# Allegro board Hirose70239_Jan21.brd
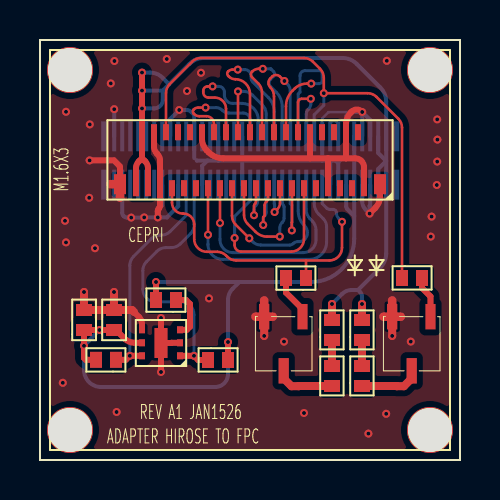
[diagram p0: board, top side]
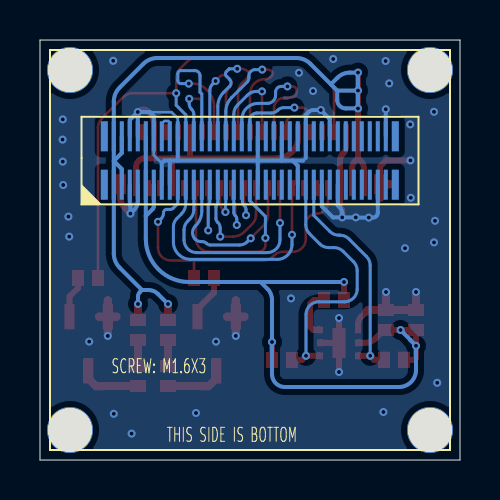
[diagram p1: board, bottom side, seen from below]

Outline 21 x 21 mm; copper layers: TOP, BOTTOM. Coordinates in mm from the lower left corner of the outline.
Outline path: 0,21 0,0 21,0 21,21 0,21

## Design rules (mm)
constraint set DEFAULT: min track width 0.127
net group IR_UART_RX: nets IR_UART_RX N3267747
net group IR_UART_TX: nets IR_UART_TX N3267743

## Placement (name value [footprint] x y rotation side)
C1  0.1uF  [C0402_SMT]  2.2 6.5 90 top
C2  0.1uF  [C0402_SMT]  3.7 6.5 90 top
D1  LED  [LED0402_SMT]  14.6 6 90 top
D2  LED  [LED0402_SMT]  16.1 6 90 top
J1  Hirose FH35C-39S-0.3SHW  [FH35C-39S-0D3SHW]  10.5 13.59 0 top
J2  DF40HC(3.0)-70DS-0.4V(51)  [DF40HC-70DS_]  17.31 16.18 180 bottom
NOREF  -  [unnamed]  1.5 1.5 0 top
NOREF#2  -  [#2]  1.5 1.5 0 top
NOREF#3  -  [unnamed]  19.5 19.5 0 top
NOREF#4  -  [#2]  0 0 90 top
NOREF#5  -  [unnamed]  1.5 19.5 0 top
NOREF#6  -  [unnamed]  19.5 1.5 0 top
NOREF#7  -  [#2]  0 21 0 top
NOREF#8  -  [unnamed#2]  3.23 16.18 180 bottom
NOREF#9  -  [unnamed#2]  3.23 13.77 180 bottom
NOREF#10  -  [unnamed#2]  17.79 13.77 180 bottom
NOREF#11  -  [unnamed#2]  17.79 16.18 180 bottom
Q1  MMBT2222ALT1G  [SOT-23-3]  13.6 7.6 180 top
Q2  MMBT2222ALT1G  [SOT-23-3]  20 7.6 180 top
R1  1K  [R0402_SMT]  18.1 9.1 0 top
R2  1K  [R0402_SMT]  13.3 9.1 180 top
R3  10K  [R0402_SMT]  6.8 8 180 top
R4  10K  [R0402_SMT]  3.8 5.01 180 top
R5  10K  [R0402_SMT]  8.4 5 0 top
R6  20K  [R0402_SMT]  14.6 3.7 90 top
R7  20K  [R0402_SMT]  16.1 3.7 90 top
U1  TMP117  [WDFN-6-EP-2X2]  7.1 6.9 180 top

## Library data of the parts
C1 C2 = CAP NP
D1 D2 = LED
J1 = HiroseFPC_0
J2 = Header2x35
Q1 Q2 = MMBT2222AL
R1 R2 = R: signal model: DEFAULT_RESISTOR_10000OHM_2_1
R3-R7 = R
U1 = TMP117

## Footprints (pads in the part's own frame, mm; a bottom-side part is the same pattern mirrored in y, then rotated)
C0402_SMT
  rect 0.6x0.8 smd: 1(0,0) 2(1,0)
DF40HC-70DS_
  rect 0.2x1.5 smd: 1(0,-2.42) 2(0,0) 3(0.4,-2.42) 4(0.4,0) 5(0.8,-2.42) 6(0.8,0) 7(1.2,-2.42) 8(1.2,0) 9(1.6,-2.42) 10(1.6,0) 11(2,-2.42) 12(2,0) 13(2.4,-2.42) 14(2.4,0) 15(2.8,-2.42) 16(2.8,0) 17(3.2,-2.42) 18(3.2,0) 19(3.6,-2.42) 20(3.6,0) 21(4,-2.42) 22(4,0) 23(4.4,-2.42) 24(4.4,0) 25(4.8,-2.42) 26(4.8,0) 27(5.2,-2.42) 28(5.2,0) 29(5.6,-2.42) 30(5.6,0) 31(6,-2.42) 32(6,0) 33(6.4,-2.42) 34(6.4,0) 35(6.8,-2.42) 36(6.8,0) 37(7.2,-2.42) 38(7.2,0) 39(7.6,-2.42) 40(7.6,0) 41(8,-2.42) 42(8,0) 43(8.4,-2.42) 44(8.4,0) 45(8.8,-2.42) 46(8.8,0) 47(9.2,-2.42) 48(9.2,0) 49(9.6,-2.42) 50(9.6,0) 51(10,-2.42) 52(10,0) 53(10.4,-2.42) 54(10.4,0) 55(10.8,-2.42) 56(10.8,0) 57(11.2,-2.42) 58(11.2,0) 59(11.6,-2.42) 60(11.6,0) 61(12,-2.42) 62(12,0) 63(12.4,-2.42) 64(12.4,0) 65(12.8,-2.42) 66(12.8,0) 67(13.2,-2.42) 68(13.2,0) 69(13.6,-2.42) 70(13.6,0)
FH35C-39S-0D3SHW
  rect 0.3x0.8 smd: 1(-5.7,0) 2(-5.4,2.8) 3(-5.1,0) 4(-4.8,2.8) 5(-4.5,0) 6(-4.2,2.8) 7(-3.9,0) 8(-3.6,2.8) 9(-3.3,0) 10(-3,2.8) 11(-2.7,0) 12(-2.4,2.8) 13(-2.1,0) 14(-1.8,2.8) 15(-1.5,0) 16(-1.2,2.8) 17(-0.9,0) 18(-0.6,2.8) 19(-0.3,0) 20(0,2.8) 21(0.3,0) 22(0.6,2.8) 23(0.9,0) 24(1.2,2.8) 25(1.5,0) 26(1.8,2.8) 27(2.1,0) 28(2.4,2.8) 29(2.7,0) 30(3,2.8) 31(3.3,0) 32(3.6,2.8) 33(3.9,0) 34(4.2,2.8) 35(4.5,0) 36(4.8,2.8) 37(5.1,0) 38(5.4,2.8) 39(5.7,0)
  rect 0.6x1 smd: 40(6.5,0.2) 41(-6.5,0.2)
LED0402_SMT
  rect 0.6x0.8 smd: 1(0,0) 2(1,0)
R0402_SMT
  rect 0.6x0.8 smd: 1(0,0) 2(1,0)
SOT-23-3
  rect 0.51x1.27 smd: 1(0.476,0.434) 2(2.391,0.434) 3(1.415,3.142)
unnamed
  round 2.3 hole 2.2 unplated: (0,0)
unnamed#2
  rect 0.35x1.5 smd: (0,0)
WDFN-6-EP-2X2
  rect 0.3x0.35 smd: 1(0.1,1.69) 2(0.1,1.04) 3(0.1,0.39) 4(2,0.39) 5(2,1.04) 6(2,1.69)
  rect 0.65x1.5 smd: 7(1.05,1.05)

## Nets
GND: C1.2 C2.2 J1.4 J1.5 J1.12 J1.30 J1.33 J1.36 J1.39 J1.40 J1.41 J2.5 J2.6 J2.7 J2.8 J2.12 J2.13 J2.15 J2.18 J2.37 J2.38 J2.44 J2.47 J2.50 J2.53 J2.56 J2.57 J2.67 J2.70 Q1.2(EMITTER) Q2.2(EMITTER) U1.2 U1.4 U1.7
ALERT: R3.1 U1.3
IR_1V8: C1.1 C2.1 J2.9 J2.10 J2.11 R3.2 R4.2 R5.2 U1.5(V+)
IR_3V3: J2.14 J2.16
IR_5V0: D1.2 D2.2 J1.1 J1.2 J1.3(VDD50#3) J2.1 J2.2 J2.3 J2.4
IR_D0: J1.13 J2.19
IR_D1: J1.14 J2.36
IR_D2: J1.15 J2.21
IR_D3: J1.16 J2.34
IR_D4: J1.17 J2.23
IR_D5: J1.18 J2.32
IR_D6: J1.19 J2.27
IR_D7: J1.20 J2.30
IR_D8: J1.21 J2.33
IR_D9: J1.22 J2.28
IR_D10: J1.23 J2.31
IR_D11: J1.24 J2.26
IR_D12: J1.25 J2.29
IR_D13: J1.26 J2.24
IR_D14: J2.49 R5.1 U1.1
IR_D15: J2.51 R4.1 U1.6
IR_HSYNC: J1.28 J2.22
IR_PCLK: J1.29 J2.35
IR_UART_RX: J1.6 J2.20 R1.1
IR_UART_TX: J1.7 J2.17 R2.1
IR_VSYNC: J1.27 J2.25
N3267503: D2.1(CATHODE) R7.2
N3267563: D1.1(CATHODE) R6.2
N3267651: Q1.3 R6.1
N3267655: Q2.3 R7.1
N3267743: Q1.1 R2.2
N3267747: Q2.1 R1.2

Pads without a net: J1 8 9 10 11 31 32 34 35 37 38; J2 39 40 41 42 43 45 46 48 52 54 55 58 59 60 61 62 63 64 65 66 68 69

## Via types
v1: diameter 0.4, hole 0.2, TOP to BOTTOM, 70 vias

## Routing (per net, layer and track width the routed paths; a pad name or vN(x,y) marks a point on that pad's centre or on a via; arc(x,y) is an arc through that point)
GND: length 80.5
  TOP w0.3: 15.3,15.08 J1.36 15.3,16.78 arc(15.36,17.1) 15.55,17.38 15.59,17.42 arc(15.84,17.52) 16.09,17.42 v1(16.11,17.4) ; 15.3,15.08 14.4,15.08 ; 15.3,15.08 15.76,15.08 arc(16.07,14.96) 16.2,14.65 J1.39 ; 14.4,15.08 J1.33 ; 14.4,15.08 13.5,15.08 ; v1(16.48,12.32) 16.75,12.59 arc(16.94,12.87) 17,13.19 J1.40 ; J1.30 13.5,15.08 ; 13.5,15.08 9.16,15.08 arc(8.77,15.16) 8.44,15.38 8.32,15.5 arc(8.16,15.74) 8.1,16.04 J1.12 ; 4.7,7.4 4.95,7.15 arc(5.06,6.98) 5.1,6.79 U1.4 ; U1.7 v1(6.05,4.4) ; U1.7 6.57,5.85 6.58,5.86 U1.2 ; U1.7 v1(6.05,7.1) ; v1(2.48,14.98) 3.7,14.98 3.98,14.7 arc(4,14.66) 4,14.62 J1.41 ; J1.4 5.7,15.66 arc(5.74,15.48) 5.84,15.33 5.86,15.31 arc(5.96,15.16) 6,14.98 J1.5 6,12.7 arc(5.99,12.64) 5.95,12.58 5.94,12.57 arc(5.9,12.52) 5.89,12.46 v1(5.89,12.13)
  TOP w0.4: 4.7,7.4 4.6,7.5 C2.2 ; Q1.2 v1(11.21,6.2) ; v1(2.2,8.4) C1.2 C2.2 ; C2.2 v1(3.7,8.4) ; Q2.2 v1(17.61,6.2)
  TOP w0.427: Q1.2 11.64,7.17 ; Q1.2 11.21,7.98 ; Q1.2 10.78,7.17 ; Q2.2 17.61,7.98 ; Q2.2 18.04,7.17 ; Q2.2 17.18,7.17 ; 4,13.11 J1.41 3.52,13.79
  BOTTOM w0.127: J2.18 14.11,17.08 14.42,17.39 15.51,17.39 ; 7.84,14.97 7.71,15.1 ; J2.12 15.31,15.24 14.91,14.84
  BOTTOM w0.2: 14.11,14.97 J2.18 ; 14.11,14.97 14.51,14.97 14.51,14.97 ; 14.11,14.97 10.11,14.97 ; 8.91,14.97 8.91,14.97 10.11,14.97 ; 8.91,14.97 8.91,16.18 ; 8.91,14.97 8.37,14.97 ; J2.12 15.31,17.19 15.52,17.4 v1(16.11,17.4) ; 10.11,13.77 10.11,14.97 ; 10.11,14.97 10.11,16.18 ; 8.11,13.77 8.11,14.71 8.37,14.97 ; J2.7 16.11,12.93 arc(16.15,12.71) 16.28,12.52 v1(16.48,12.32) 16.48,12.71 16.51,12.74 J2.5 ; J2.13 14.91,14.84 14.78,14.97 14.51,14.97 ; v1(5.89,12.13) v1(5.21,12.13) 5.2,12.12 v1(4.56,12.12) 4.35,12.12 arc(4.27,12.14) 4.2,12.18 4.17,12.21 arc(4.13,12.28) 4.11,12.36 4.11,13.77 ; v1(5.89,12.13) 6.35,12.13 6.91,12.69 6.91,13.77 ; v1(5.89,12.13) 5.89,12.37 arc(5.91,12.5) 5.99,12.61 6.11,12.73 6.11,13.77 ; J2.15 14.51,14.97 ; 6.51,16.18 6.51,17.05 v1(6.96,17.5) 7.32,17.5 arc(7.46,17.47) 7.58,17.39 7.71,17.26 7.71,15.1 ; J2.8 v1(16.11,17.4) ; v1(16.11,17.4) 16.51,17 J2.6 ; 8.37,14.97 7.84,14.97 7.84,14.97 ; 3.71,16.18 v1(3.71,17.54)
  vias: v1(1.14,3.86) v1(1.25,11.96) v1(1.3,17.41) v1(1.3,10.88) v1(2.49,16.78) v1(2.46,13.11) v1(2.75,10.59) v1(3.54,18.83) v1(3.72,19.95) v1(3.83,2.4) v1(6.34,20.05) v1(7.35,18.45) v1(8.05,19.36) v1(8.45,8.08) v1(12.2,5.92) v1(13.2,2.35) v1(16.42,1.32) v1(17.34,19.96) v1(17.31,2.31) v1(18.54,5.92) v1(19.54,11.17) v1(19.58,12.17) v1(19.84,13.75) v1(19.86,17.03) v1(19.87,16.02) v1(19.86,14.92)
ALERT: length 2.5
  TOP w0.3: U1.3 7.34,6.51 7.5,6.67 7.5,7.8 7.3,8 R3.1
IR_1V8: length 40.1
  TOP w0.3: U1.5 4.74,5.86 arc(4.46,5.92) 4.23,6.07 3.8,6.5 C2.1 v1(2.97,6.5) C1.1 v1(2.2,5.71) 2.2,5.1 2.29,5.01 R4.2 ; R3.2 v1(5.8,8.9) ; R5.2 v1(9.4,5.9)
  BOTTOM w0.2: J2.10 J2.9 15.71,12.2 ; J2.11 15.31,12.68 arc(15.33,12.61) 15.37,12.54 15.71,12.2 ; 9.97,8.9 9.62,8.55 arc(9.46,8.31) 9.4,8.02 v1(9.4,5.9) 9.4,4.29 arc(9.21,3.84) 8.76,3.65 3.05,3.65 arc(2.45,3.9) 2.2,4.5 v1(2.2,5.71) 2.48,5.99 2.48,6 v1(2.97,6.5) ; 9.97,8.9 v1(5.8,8.9) ; 9.97,8.9 13.55,8.9 arc(15.08,9.53) 15.71,11.06 15.71,12.2
IR_3V3: length 1.8
  BOTTOM w0.127: J2.14 14.91,16.81 14.77,16.95 14.59,16.95 14.51,16.87 J2.16
IR_5V0: length 43.1
  TOP w0.3: 5.1,15.09 J1.2 v1(5.1,17.58) v1(5.1,18.47) v1(5.1,19.37) ; 5.1,15.09 5.26,14.93 arc(5.36,14.77) 5.4,14.59 J1.3 ; 5.1,15.09 4.94,14.93 arc(4.84,14.77) 4.8,14.59 J1.1
  TOP w0.4: D2.2 v1(16.1,7.8) ; D1.2 v1(14.6,7.8)
  BOTTOM w0.2: v1(5.1,18.47) v1(5.1,19.37) 5.5,19.37 arc(5.84,19.3) 6.13,19.11 6.46,18.79 ; v1(5.1,18.47) 6.14,18.47 ; v1(5.1,18.47) v1(5.1,17.58) 5.71,17.58 arc(6.02,17.7) 6.14,18 6.14,18.47 ; 6.14,18.47 6.46,18.79 ; 17.31,14.95 16.91,15.35 J2.4 ; 17.31,14.95 J2.1 17.31,10.32 arc(17.23,9.94) 17.02,9.62 15.9,8.5 ; 17.31,14.95 16.91,14.55 J2.3 ; 17.31,14.95 J2.2 17.31,17.92 arc(17.23,18.3) 17.02,18.62 15.83,19.81 arc(15.51,20.02) 15.13,20.1 8.18,20.1 arc(7.8,20.02) 7.48,19.81 6.46,18.79 ; v1(16.1,7.8) 16.1,8.18 arc(16.08,8.29) 16.01,8.39 15.9,8.5 ; v1(14.6,7.8) 15.1,8.3 arc(15.32,8.45) 15.58,8.5 15.9,8.5
IR_D0: length 12.7
  TOP w0.127: J1.13 v1(8.4,11.26)
  BOTTOM w0.15: v1(8.4,11.26) 8.4,10.77 arc(8.62,10.25) 9.14,10.03 13.46,10.03 arc(14.08,10.28) 14.33,10.9 14.33,11.66 arc(14.29,11.88) 14.16,12.07 13.93,12.3 arc(13.77,12.54) 13.71,12.83 J2.19
IR_D1: length 5.9
  TOP w0.127: J1.14 8.7,16.8 arc(8.59,17.08) 8.31,17.19 7.96,17.19 arc(7.82,17.22) 7.71,17.3 7.68,17.32 arc(7.64,17.42) 7.68,17.52 7.69,17.53 arc(7.79,17.6) 7.91,17.62 v1(8.28,17.62)
  BOTTOM w0.15: v1(8.28,17.62) 8.8,17.62 arc(8.97,17.59) 9.11,17.49 9.12,17.48 arc(9.26,17.38) 9.43,17.35 10.15,17.35 arc(10.41,17.25) 10.51,16.99 10.51,16.18
IR_D2: length 11
  TOP w0.127: J1.15 v1(9,11.85)
  BOTTOM w0.15: 13.31,13.77 13.31,12.51 arc(13.36,12.27) 13.5,12.06 13.61,11.95 arc(13.75,11.74) 13.8,11.5 13.8,11.01 arc(13.61,10.56) 13.16,10.37 9.64,10.37 arc(9.19,10.56) 9,11.01 v1(9,11.85)
IR_D3: length 7.6
  TOP w0.127: v1(8.63,18.68) 8.38,18.68 arc(8.23,18.62) 8.16,18.46 8.16,18.39 arc(8.24,18.2) 8.43,18.12 8.74,18.12 arc(9.14,17.96) 9.3,17.56 J1.16
  BOTTOM w0.15: v1(8.63,18.68) 8.94,18.68 arc(9.14,18.6) 9.22,18.4 9.22,18.24 arc(9.34,17.95) 9.63,17.83 10.09,17.83 arc(10.67,17.59) 10.91,17.01 10.91,16.18
IR_D4: length 8.7
  TOP w0.127: v1(10.46,11.09) 9.79,11.76 arc(9.65,11.97) 9.6,12.21 J1.17
  BOTTOM w0.15: v1(10.46,11.09) 10.64,10.91 arc(10.82,10.79) 11.02,10.75 12.48,10.75 arc(12.58,10.77) 12.67,10.83 arc(12.77,10.9) 12.89,10.92 12.95,10.92 arc(13.11,10.95) 13.24,11.04 arc(13.37,11.37) 13.24,11.69 13.22,11.71 arc(12.99,12.05) 12.91,12.46 12.91,13.77
IR_D5: length 5.1
  TOP w0.127: J1.18 v1(9.9,18.43)
  BOTTOM w0.15: v1(9.9,18.43) 10.18,18.43 arc(10.42,18.38) 10.62,18.25 11.12,17.75 arc(11.26,17.54) 11.31,17.3 11.31,16.18
IR_D6: length 6.3
  TOP w0.127: v1(11.99,11.17) 11.35,11.17 arc(11.05,11.23) 10.78,11.41 10.39,11.8 arc(10.25,12.01) 10.2,12.25 J1.19
  BOTTOM w0.15: v1(11.99,11.17) 11.99,11.6 arc(12.02,11.75) 12.11,11.88 12.12,11.89 arc(12.18,11.98) 12.2,12.09 12.2,12.65 arc(12.19,12.7) 12.17,12.74 arc(12.12,12.81) 12.11,12.88 12.11,13.77
IR_D7: length 8.5
  TOP w0.127: v1(9.89,19.52) 9.63,19.52 arc(9.51,19.5) 9.41,19.43 9.4,19.42 arc(9.36,19.32) 9.4,19.21 9.45,19.17 arc(9.59,19.07) 9.76,19.04 arc(10.28,18.82) 10.5,18.3 J1.20
  BOTTOM w0.15: 11.71,16.18 11.71,17.42 arc(11.63,17.8) 11.42,18.12 10.64,18.9 arc(10.58,18.99) 10.56,19.1 10.56,19.2 arc(10.46,19.43) 10.24,19.52 v1(9.89,19.52)
IR_D8: length 3
  TOP w0.127: v1(10.7,12.24) 10.7,12.7 arc(10.71,12.76) 10.74,12.8 10.76,12.82 arc(10.79,12.87) 10.8,12.92 J1.21
  BOTTOM w0.15: 10.91,13.77 10.88,13.73 10.88,12.93 arc(10.86,12.82) 10.8,12.73 10.78,12.71 arc(10.72,12.62) 10.7,12.52 v1(10.7,12.24)
IR_D9: length 8
  TOP w0.127: v1(11.14,19.56) 10.93,19.56 arc(10.76,19.53) 10.62,19.43 10.6,19.41 arc(10.54,19.28) 10.6,19.14 10.91,18.83 arc(11.05,18.62) 11.1,18.38 J1.22
  BOTTOM w0.15: 12.11,16.18 12.11,17.68 arc(12.03,18.06) 11.82,18.38 11.52,18.68 arc(11.45,18.86) 11.52,19.03 11.69,19.2 arc(11.73,19.3) 11.69,19.41 11.56,19.54 11.55,19.54 11.53,19.56 v1(11.14,19.56)
IR_D10: length 4
  TOP w0.127: J1.23 11.4,13.11 arc(11.38,13.01) 11.32,12.92 11.31,12.91 arc(11.25,12.82) 11.23,12.72 11.23,12.21 11.16,12.14 v1(11.16,11.75)
  BOTTOM w0.15: 11.31,13.77 11.31,12.38 arc(11.29,12.3) 11.24,12.22 11.23,12.21 arc(11.18,12.13) 11.16,12.05 v1(11.16,11.75)
IR_D11: length 6.5
  TOP w0.127: v1(12.22,18.95) 12,19.17 arc(11.8,19.25) 11.6,19.17 11.51,19.08 arc(11.42,18.86) 11.51,18.64 arc(11.65,18.43) 11.7,18.19 J1.24
  BOTTOM w0.15: 12.51,16.18 12.51,18.47 arc(12.47,18.65) 12.37,18.8 v1(12.22,18.95)
IR_D12: length 2.7
  TOP w0.127: J1.25 12,12.85 arc(11.97,12.68) 11.87,12.54 v1(11.73,12.4)
  BOTTOM w0.15: 11.71,13.77 11.71,12.81 11.73,12.79 v1(11.73,12.4)
IR_D13: length 8.6
  TOP w0.127: J1.26 12.3,17.69 arc(12.38,18.11) 12.62,18.46 12.72,18.56 arc(13.01,18.75) 13.35,18.82 v1(13.56,18.82)
  BOTTOM w0.15: 12.91,16.18 12.91,18.3 13,18.39 13,19.21 arc(13.08,19.39) 13.26,19.47 13.96,19.47 arc(14.07,19.43) 14.11,19.32 14.11,18.97 arc(14.07,18.86) 13.96,18.82 v1(13.56,18.82)
IR_D14: length 13.5
  TOP w0.3: R5.1 7.91,5 v1(7.7,5.21) U1.1
  BOTTOM w0.15: 7.71,13.77 7.71,11.76 arc(7.66,11.52) 7.52,11.31 7.02,10.81 arc(6.81,10.67) 6.57,10.62 6.29,10.62 arc(6.05,10.57) 5.84,10.43 5.33,9.92 arc(5.19,9.71) 5.14,9.47 5.14,8.54 arc(5.33,8.1) 5.78,7.91 7.06,7.91 arc(7.51,7.72) 7.7,7.28 v1(7.7,5.21)
IR_D15: length 11.4
  TOP w0.3: R4.1 4.29,5.01 v1(4.49,5.21) U1.6
  BOTTOM w0.15: v1(4.49,5.21) 4.49,9.73 arc(4.54,9.97) 4.68,10.18 5.55,11.05 arc(5.76,11.19) 6,11.24 6.06,11.24 arc(6.3,11.29) 6.51,11.43 7.31,12.23 7.31,13.77
IR_HSYNC: length 4.2
  TOP w0.127: J1.28 12.9,17.88 arc(12.91,17.95) 12.95,18 12.96,18.01 arc(13.01,18.05) 13.08,18.06 v1(13.54,18.06)
  BOTTOM w0.15: v1(13.54,18.06) 13.54,17.81 arc(13.51,17.67) 13.44,17.55 13.41,17.53 arc(13.34,17.42) 13.31,17.28 13.31,16.18
IR_PCLK: length 9.9
  TOP w0.127: v1(9.73,11.1) 9.73,10.75 arc(9.83,10.52) 10.06,10.42 12.56,10.42 arc(13.01,10.61) 13.2,11.05 J1.29
  BOTTOM w0.15: v1(9.73,11.1) 9.73,12.18 10.51,12.96 10.51,13.77
IR_UART_RX: length 26.5
  TOP w0.127: R1.1 18.1,16.62 arc(18.05,16.86) 17.91,17.07 16.83,18.15 arc(16.62,18.29) 16.38,18.34 v1(14.19,18.34) 14.19,19.11 arc(14.14,19.35) 14,19.56 13.65,19.91 arc(13.44,20.05) 13.2,20.1 8.05,20.1 arc(7.81,20.05) 7.6,19.91 6.49,18.8 arc(6.35,18.59) 6.3,18.35 J1.6
  BOTTOM w0.15: J2.20 13.71,17.26 14.19,17.74 v1(14.19,18.34)
IR_UART_TX: length 16
  TOP w0.127: J1.7 6.6,12.86 arc(6.76,12.48) 7.14,12.32 7.17,12.32 arc(7.55,12.16) 7.71,11.78 7.71,11.04 arc(7.9,10.6) 8.35,10.41 8.85,10.41 arc(9.1,10.36) 9.3,10.22 9.37,10.16 arc(9.57,10.03) 9.81,9.98 13.3,9.98 ; 13.3,9.98 14.46,9.98 arc(14.91,10.16) 15.1,10.61 v1(15.1,11.91) ; 13.3,9.98 R2.1
  BOTTOM w0.15: v1(15.1,11.91) 14.94,12.07 arc(14.85,12.2) 14.82,12.35 14.82,12.37 arc(14.78,12.48) 14.66,12.53 14.48,12.53 arc(14.41,12.54) 14.35,12.58 14.11,12.82 J2.17
IR_VSYNC: length 4.4
  TOP w0.127: J1.27 12.6,11.88 12.59,11.87 v1(12.59,11.48)
  BOTTOM w0.15: 12.51,13.77 12.51,12.82 12.59,12.74 v1(12.59,11.48)
N3267503: length 1.3
  TOP w0.4: D2.1 R7.2
N3267563: length 1.3
  TOP w0.4: D1.1 R6.2
N3267651: length 3
  TOP w0.4: R6.1 12.94,3.7 12.93,3.69 12.57,3.69 12.19,4.08 Q1.3
N3267655: length 3
  TOP w0.4: Q2.3 18.59,4.08 18.2,3.69 17.84,3.69 17.83,3.7 R7.1
N3267743: length 2.3
  TOP w0.3: Q1.1 13.12,7.55 12.3,8.37 R2.2
N3267747: length 2.1
  TOP w0.3: Q2.1 19.52,8.18 19.1,8.6 R1.2

## Copper pours and planes (outline as drawn; the poured copper is in the pictures)
GND on TOP: 0.55,20.45 0.55,0.55 20.45,0.55 20.45,20.45 ; 1 cut-out
GND on BOTTOM: 0.5,20.51 20.49,20.51 20.5,20.5 20.5,0.5 20.49,0.49 0.5,0.49 ; 2 cut-outs

## Text on the board
Ref Des/Silkscreen Bottom: THIS SIDE IS BOTTOM | SCREW: M1.6X3
Ref Des/Silkscreen Top: ADAPTER HIROSE TO FPC | CEPRI | REV A1 JAN1526 | M1.6X3
NCLEGEND-1-2: FIGURE | FINISHED_SIZE | 0.2 | 2.2 | DRILL CHART: TOP to BOTTOM | ALL UNITS ARE IN MILLIMETERS | PLATED | NON-PLATED | QTY | 70 | 4
